# EAGLE board BMS Adapter (EAGLE 9.1.3)
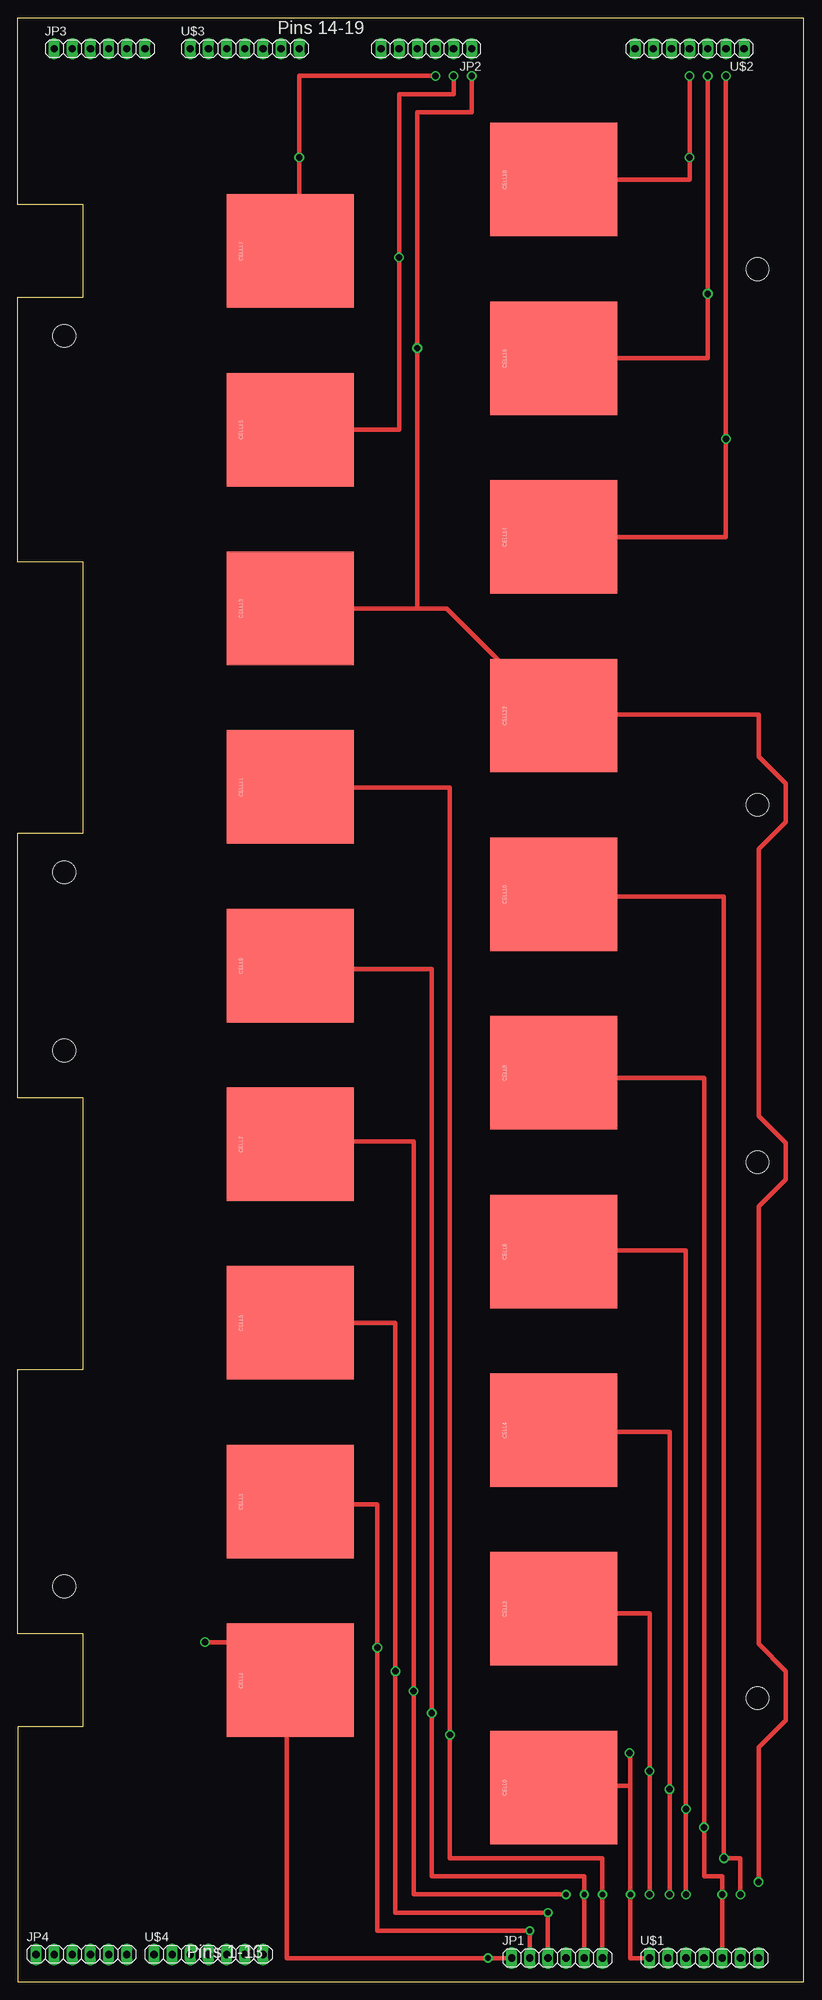
[diagram p0: board, top side]
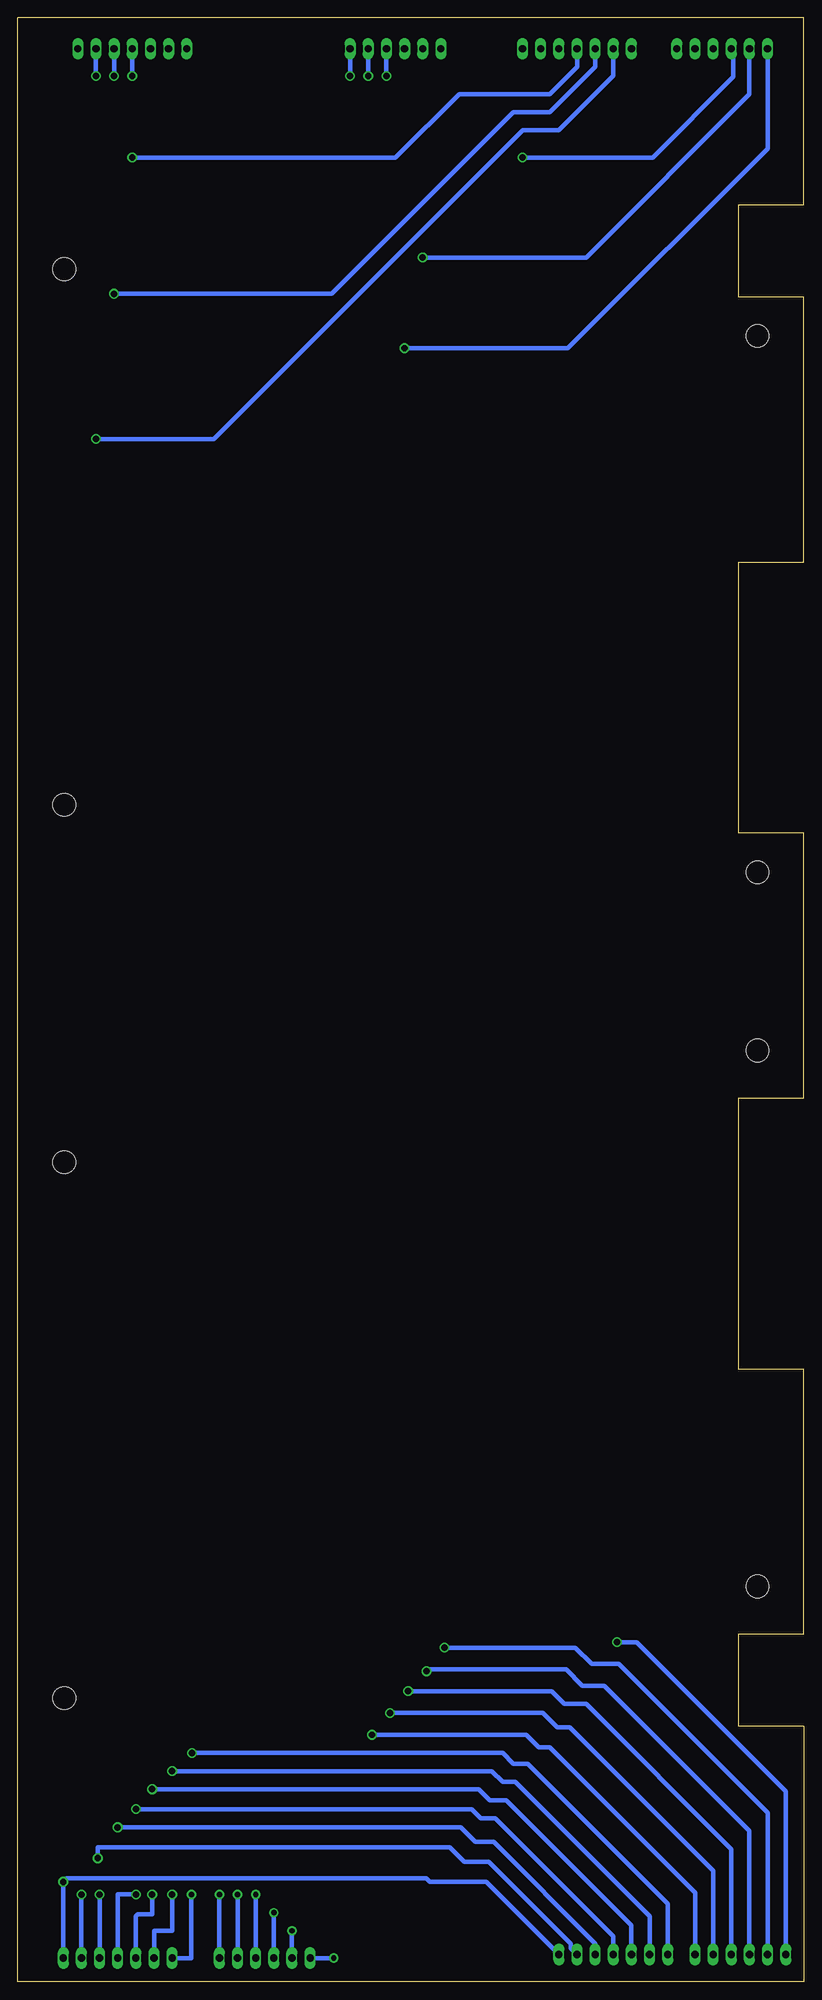
[diagram p1: board, bottom side, seen from below]

Size 109.98 x 274.83 mm. Coordinates in mm from the lower left corner, seen from the top.
Outline: 0,0 109.98,0 109.98,274.83 0,274.83 0,248.67 9.14,248.67 9.14,235.71 0,235.71 0,198.67 9.14,198.67 9.14,160.71 0,160.71 0,123.67 9.14,123.67 9.14,85.71 0,85.71 0,48.67 9.14,48.67 9.14,35.71 0,35.71 0,0
Copper layers (1*16): Top 0.035mm / dielectric 1.5mm / Bottom 0.035mm
Design rules "DRC Advanced Circuits *": minimum track width 6mil, minimum drill 15mil, track to track 24mil, track to pad 24mil, pad to pad 24mil, via to via 24mil, smd to smd 24mil, copper to edge 40mil, drill to drill 6mil, minimum pad ring 10mil, minimum via ring 8mil, stop-mask expansion 4mil, vias tented up to drill 0mil, thermal gap 10mil
Holes 3.2 mm at 6.5,55.31 6.5,130.31 103.5,114.69 103.5,39.69 6.5,155.25 103.5,164.69 6.49,230.31 103.5,239.66
bKeepout: area 58.4,0 to 110,12.7; area 53.3,262.1 to 110,274.8; area 0,0 to 58.4,12.7; area 0,262.1 to 53.3,274.8

## Footprints (pad centres in the part's own frame; a part is rotated, then mirrored left to right if it is on the bottom)
KEYSTONE5222 = smd 15.875 x 17.78: P$1 0,0
1X06 = drill 1.016 long: 1 -6.35,0; 2 -3.81,0; 3 -1.27,0; 4 1.27,0; 5 3.81,0; 6 6.35,0
1X07 = drill 1.016 long: 1 -7.62,0; 2 -5.08,0; 3 -2.54,0; 4 0,0; 5 2.54,0; 6 5.08,0; 7 7.62,0

## Placement (x,y rotation side)
CELL0  BATTERY_SPRING_KEYSTONE5222  [KEYSTONE5222]  75,27.19 270 top
CELL1  BATTERY_SPRING_KEYSTONE5222  [KEYSTONE5222]  38.1,42.19 270 top
CELL2  BATTERY_SPRING_KEYSTONE5222  [KEYSTONE5222]  75,52.19 270 top
CELL3  BATTERY_SPRING_KEYSTONE5222  [KEYSTONE5222]  38.1,67.19 270 top
CELL4  BATTERY_SPRING_KEYSTONE5222  [KEYSTONE5222]  75,77.19 270 top
CELL5  BATTERY_SPRING_KEYSTONE5222  [KEYSTONE5222]  38.1,92.19 270 top
CELL6  BATTERY_SPRING_KEYSTONE5222  [KEYSTONE5222]  75,102.19 270 top
CELL7  BATTERY_SPRING_KEYSTONE5222  [KEYSTONE5222]  38.1,117.19 270 top
CELL8  BATTERY_SPRING_KEYSTONE5222  [KEYSTONE5222]  75,127.19 270 top
CELL9  BATTERY_SPRING_KEYSTONE5222  [KEYSTONE5222]  38.1,142.19 270 top
CELL10  BATTERY_SPRING_KEYSTONE5222  [KEYSTONE5222]  75,152.19 270 top
CELL11  BATTERY_SPRING_KEYSTONE5222  [KEYSTONE5222]  38.1,167.19 270 top
CELL12  BATTERY_SPRING_KEYSTONE5222  [KEYSTONE5222]  75,177.19 270 top
CELL13  BATTERY_SPRING_KEYSTONE5222  [KEYSTONE5222]  38.1,192.19 270 top
CELL14  BATTERY_SPRING_KEYSTONE5222  [KEYSTONE5222]  75,202.19 270 top
CELL15  BATTERY_SPRING_KEYSTONE5222  [KEYSTONE5222]  38.1,217.19 270 top
CELL16  BATTERY_SPRING_KEYSTONE5222  [KEYSTONE5222]  75,227.19 270 top
CELL17  BATTERY_SPRING_KEYSTONE5222  [KEYSTONE5222]  38.1,242.19 270 top
CELL18  BATTERY_SPRING_KEYSTONE5222  [KEYSTONE5222]  75,252.19 270 top
JP1  [1X06]  75.44,3.3 0 top
JP2  [1X06]  57.15,270.51 180 top
JP3  [1X06]  11.43,270.51 0 top
JP4  [1X06]  8.89,3.81 0 top
U$1  M07  [1X07]  96.01,3.3 0 top
U$2  M07  [1X07]  93.98,270.51 180 top
U$3  M07  [1X07]  31.75,270.51 0 top
U$4  M07  [1X07]  26.67,3.81 0 top

## Library data of the parts
CELL0 CELL1-CELL18 JP1-JP4 U$1-U$4 = HyTechDevices

## Nets
CELL0: CELL0.P$1 U$1.1 U$4.1
CELL1: CELL1.P$1 JP1.1 JP4.1
CELL2: CELL2.P$1 U$1.2 U$4.2
CELL3: CELL3.P$1 JP1.2 JP4.2
CELL4: CELL4.P$1 U$1.3 U$4.3
CELL5: CELL5.P$1 JP1.3 JP4.3
CELL6: CELL6.P$1 U$1.4 U$4.4
CELL7: CELL7.P$1 JP1.4 JP4.4
CELL8: CELL8.P$1 U$1.5 U$4.5
CELL9: CELL9.P$1 JP1.5 JP4.5
CELL10: CELL10.P$1 U$1.6 U$4.6
CELL11: CELL11.P$1 JP1.6 JP4.6
CELL12: CELL12.P$1 CELL13.P$1 JP2.1 JP3.1 U$1.7 U$4.7
CELL14: CELL14.P$1 U$2.2 U$3.2
CELL15: CELL15.P$1 JP2.2 JP3.2
CELL16: CELL16.P$1 U$2.3 U$3.3
CELL17: CELL17.P$1 JP2.3 JP3.3
CELL18: CELL18.P$1 U$2.4 U$3.4

## Tracks (layer width: path | path; a pad name or v marks a point on that pad's centre or on a via)
CELL0  (via drill 0.75 pad 1.3, 0.9)
  Top 0.61: 85.7,27.43 76.96,27.43 75.69,26.16 75.69,26.49 CELL0.P$1 | U$1.1 85.7,3.3 v85.7,12.19 85.7,27.43 | 85.7,27.43 85.7,31.9 v85.6,32
  Bottom 0.61: v85.7,12.19 85.7,3.3 U$1.1 | U$4.1 19.05,10.92 38.61,30.48 40.64,30.48 42.16,32 v85.6,32
CELL1  (via drill 0.75 pad 1.3, 0.9)
  Top 0.61: JP1.1 v65.79,3.3 37.59,3.3 37.59,41.4 38.1,41.4 CELL1.P$1 32.79,47.5 v26.16,47.5
  Bottom 0.61: v65.79,3.3 JP1.1 | JP4.1 2.54,26.67 23.37,47.5 v26.16,47.5
CELL2  (via drill 0.9)
  Top 0.61: CELL2.P$1 75.62,51.56 88.39,51.56 v88.39,29.46 v88.39,12.19
  Bottom 0.61: U$4.2 21.59,9.14 40.39,27.94 42.16,27.94 43.69,29.46 v88.39,29.46 | v88.39,12.19 88.39,7.11 90.93,7.11 U$1.2
CELL3  (via drill 0.75 pad 1.3, 0.9)
  Top 0.61: CELL3.P$1 38.1,66.8 50.29,66.8 v50.29,46.74 50.29,7.11 v71.63,7.11 JP1.2
  Bottom 0.61: JP1.2 v71.63,7.11 | JP4.2 5.08,23.62 25.91,44.45 29.72,44.45 32,46.74 v50.29,46.74
CELL4  (via drill 0.9)
  Top 0.61: CELL4.P$1 75.47,77.19 75.69,76.96 91.19,76.96 v91.19,26.92 v91.19,12.19
  Bottom 0.61: U$4.3 24.13,7.87 41.66,25.4 43.94,25.4 45.47,26.92 v91.19,26.92 | v91.19,12.19 91.19,9.4 93.22,9.4 93.47,9.14 U$1.3
CELL5  (via drill 0.75 pad 1.3, 0.9)
  Top 0.61: CELL5.P$1 38.1,92.2 52.83,92.2 v52.83,43.43 52.83,9.65 v74.17,9.65 JP1.3
  Bottom 0.61: v74.17,9.65 JP1.3 | v52.83,43.43 52.58,43.69 33.27,43.69 30.99,41.4 27.94,41.4 7.62,21.08 JP4.3
CELL6  (via drill 0.9)
  Top 0.61: CELL6.P$1 74.82,102.36 93.47,102.36 v93.47,24.13 v93.47,12.19
  Bottom 0.61: U$4.4 26.67,6.35 43.18,22.86 45.21,22.86 46.48,24.13 v93.47,24.13 | v93.47,12.19 96.01,12.19 U$1.4
CELL7  (via drill 0.75 pad 1.3, 0.9)
  Top 0.61: v76.71,12.19 55.37,12.19 v55.37,40.64 55.37,117.6 38.1,117.6 CELL7.P$1
  Bottom 0.61: JP4.4 10.16,16 10.16,18.54 30.48,38.86 33.53,38.86 35.31,40.64 v55.37,40.64 | v76.71,12.19 JP1.4
CELL8  (via drill 0.9)
  Top 0.61: U$1.5 v98.55,12.19 98.55,14.73 96.01,14.73 v96.01,21.59 96.01,126.49 76.96,126.49 75.69,127.76 75.57,127.76 CELL8.P$1
  Bottom 0.61: U$4.5 29.21,5.33 43.43,19.56 45.97,19.56 48.01,21.59 v96.01,21.59 | v98.55,12.19 U$1.5
CELL9  (via drill 0.75 pad 1.3, 0.9)
  Top 0.61: JP1.5 v79.25,12.19 79.25,14.73 57.91,14.73 v57.91,37.59 57.91,141.73 38.1,141.73 CELL9.P$1
  Bottom 0.61: v79.25,12.19 JP1.5 | JP4.5 12.7,15.49 32.77,35.56 34.54,35.56 36.58,37.59 v57.91,37.59
CELL10  (via drill 0.9)
  Top 0.61: CELL10.P$1 75.29,151.89 98.74,151.89 98.74,17.27 v98.81,17.27 101.09,17.27 v101.09,12.19
  Bottom 0.61: U$4.6 32.61,4.67 32.61,5.27 44.11,16.76 47.5,16.76 49.53,18.8 98.81,18.8 v98.81,17.27 | U$1.6 v101.09,12.19
CELL11  (via drill 0.75 pad 1.3, 0.9)
  Top 0.61: JP1.6 v81.79,12.19 81.79,17.27 60.45,17.27 v60.45,34.54 60.45,167.13 38.16,167.13 CELL11.P$1
  Bottom 0.61: v81.79,12.19 JP1.6 | JP4.6 15.24,11.68 15.24,12.45 35.56,32.77 37.08,32.77 38.86,34.54 v60.45,34.54
CELL12  (via drill 0.9)
  Top 0.61: v103.63,13.97 103.63,32.77 107.44,36.58 107.44,43.43 103.63,47.24 103.63,108.46 107.44,112.27 107.44,117.35 103.63,121.16 103.63,158.5 107.44,162.31 107.44,167.64 103.63,171.45 103.63,177.29 75.1,177.29 CELL12.P$1 59.99,192.19 55.88,192.19 | 55.88,192.19 v55.88,228.6 55.88,261.62 63.5,261.62 v63.5,266.7 | CELL13.P$1 55.88,192.19
  Bottom 0.61: U$4.7 44.45,13.97 52.32,13.97 52.83,14.48 103.12,14.48 v103.63,13.97 U$1.7 | JP3.1 5.08,256.54 33.02,228.6 v55.88,228.6 | JP2.1 v63.5,266.7
CELL14  (via drill 0.9)
  Top 0.61: CELL14.P$1 99.06,202.19 v99.06,215.9 v99.06,266.7
  Bottom 0.61: U$3.2 26.67,266.7 34.29,259.08 39.37,259.08 82.55,215.9 v99.06,215.9 | U$2.2 v99.06,266.7
CELL15  (via drill 0.9)
  Top 0.61: CELL15.P$1 53.34,217.19 v53.34,241.3 53.34,264.16 60.96,264.16 v60.96,266.7
  Bottom 0.61: JP3.2 7.62,264.16 30.48,241.3 v53.34,241.3 | JP2.2 v60.96,266.7
CELL16  (via drill 0.9)
  Top 0.61: CELL16.P$1 96.52,227.19 v96.52,236.22 v96.52,266.7
  Bottom 0.61: U$3.3 29.21,267.97 35.56,261.62 40.64,261.62 66.04,236.22 v96.52,236.22 | U$2.3 v96.52,266.7
CELL17  (via drill 0.9)
  Top 0.61: CELL17.P$1 39.37,242.19 v39.37,255.27 39.37,266.7 45.72,266.7 48.26,266.7 49.53,266.7 v58.42,266.7
  Bottom 0.61: v39.37,255.27 21.14,255.27 9.86,266.56 9.86,270.2 JP3.3 | JP2.3 v58.42,266.7
CELL18  (via drill 0.9)
  Top 0.61: CELL18.P$1 93.98,252.19 v93.98,255.27 v93.98,266.7
  Bottom 0.61: U$3.4 31.75,267.97 35.56,264.16 48.26,264.16 57.15,255.27 v93.98,255.27 | U$2.4 v93.98,266.7

## Text on the board
tPlace: Pins 14-19 | Pins 1-13
tDocu: Rubout entire top layer / / Rubout bottom layer / around connectors / (see bKeepout layer)